# Altium PCB Placa_FdC.PcbDoc (part 1 of 2)
Units mm, origin at the board's own origin, x right, y up, seen from the top; angles counter-clockwise.
Board outline 100 x 70 mm, 2 copper layers (Top Layer, Bottom Layer), stack 1.571 mm thick; 72 components, 68 nets, 328 pads, 54 vias.
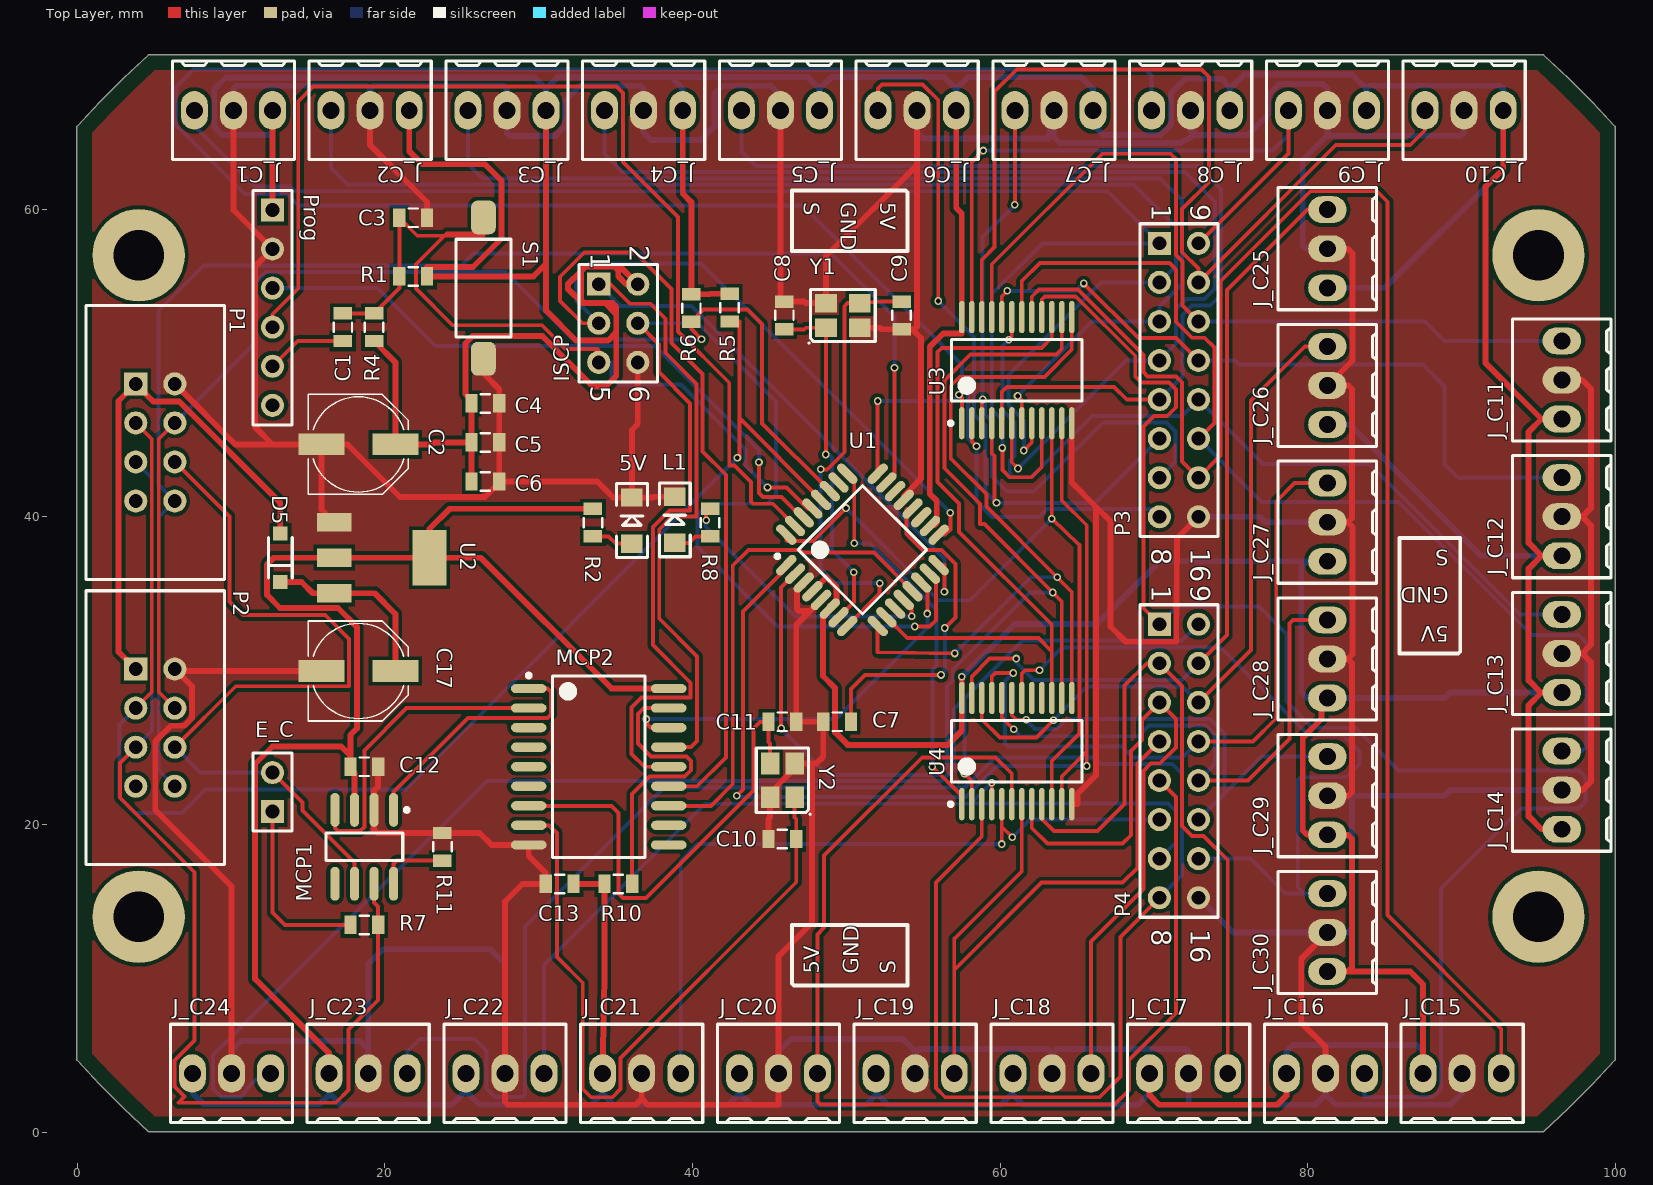
[diagram p0: Top Layer view]
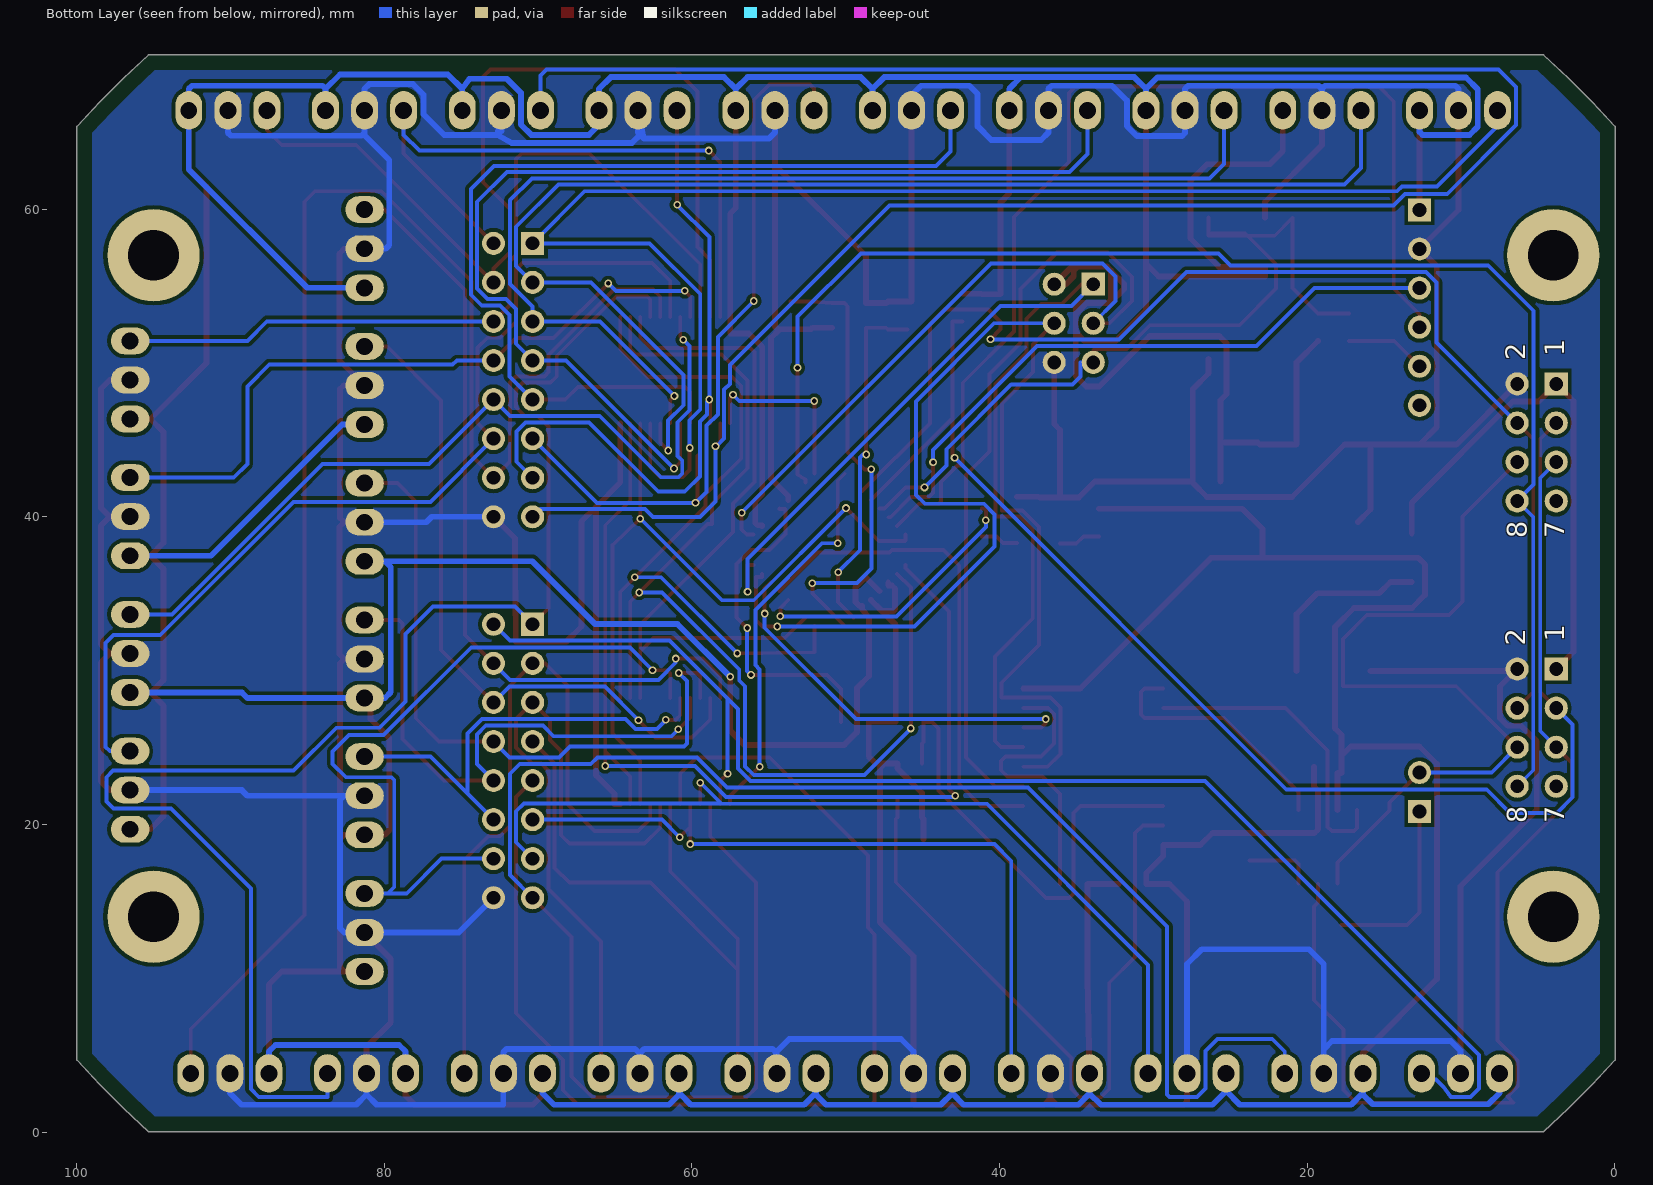
[diagram p1: Bottom Layer view, seen from below]
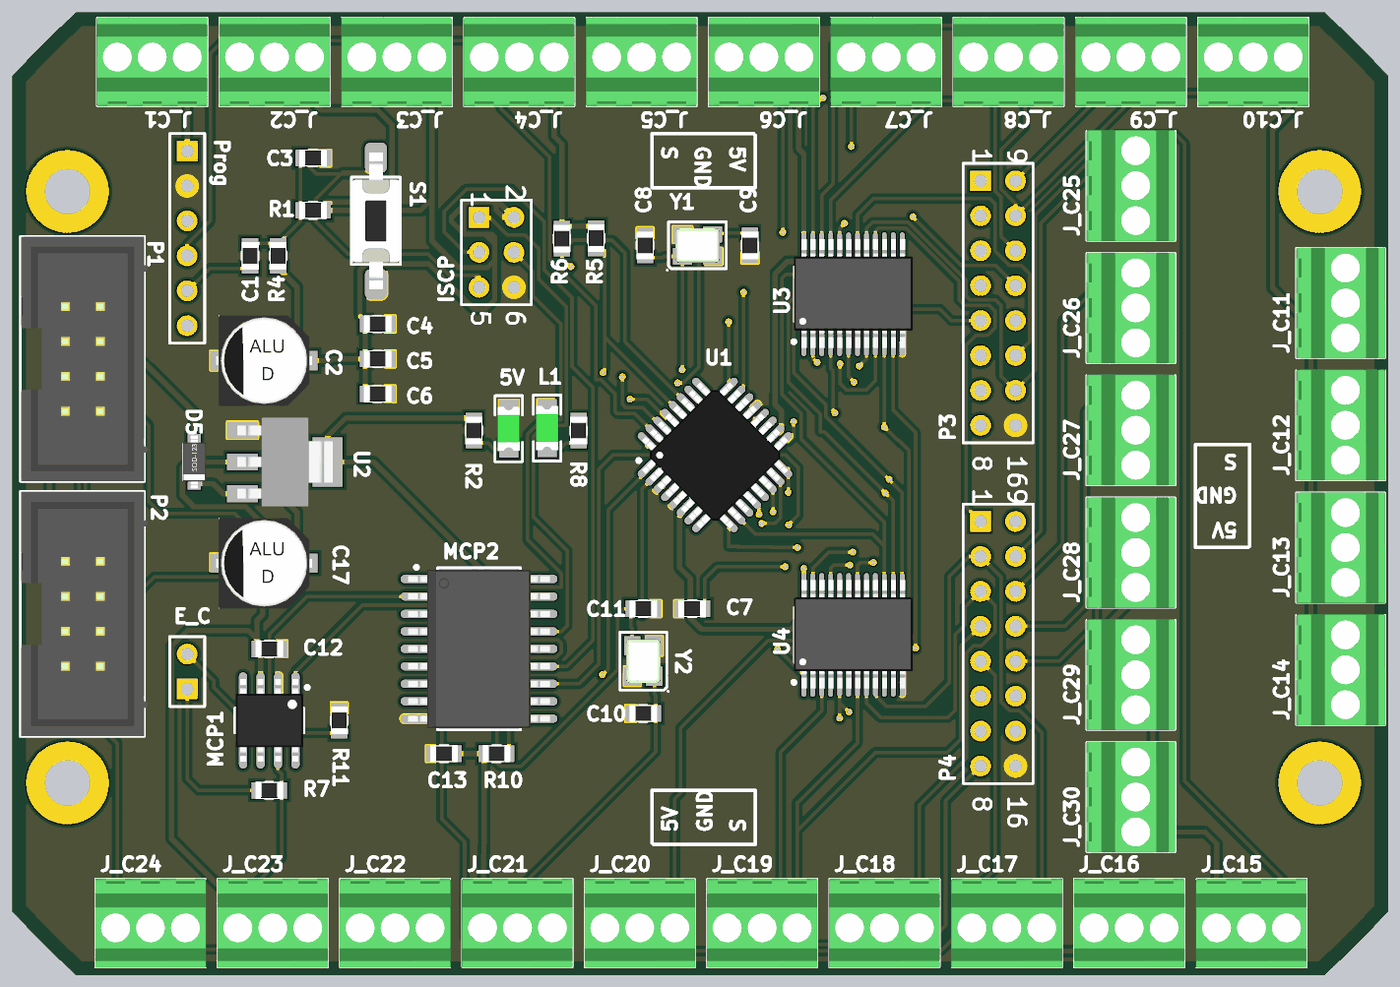
[diagram p2: 3D render of the assembled board from above, using the file's embedded part models]

## Layer stack, top to bottom
Top Solder: solder mask 0.0102, Solder Resist, Dk 3.5
Top Layer: signal copper 0.0356
Dielectric 1: dielectric 1.5, FR-4, Dk 4.8
Bottom Layer: signal copper 0.0356
Bottom Solder: solder mask 0.0102, Solder Resist, Dk 3.5

## Board outline
-0.016,49.637 -0.016,65.373 1.485,66.974 3.036,68.525 4.637,70.026 95.331,70.026 96.932,68.525 98.483,66.974 99.984,65.373 99.984,4.679 98.483,3.078 96.932,1.527 95.331,0.026 4.637,0.026 3.036,1.527 1.485,3.078 -0.016,4.679

## Design rules (kind name [scope] priority, off if disabled: settings)
BoardOutlineClearance [All] p1: gap=1 ignorepadtopadclearanceinfootprint=FALSE
Clearance Clearance_2 [InNamedPolygon('GND TOP PLANE')] p1: gap=0.254 ignorepadtopadclearanceinfootprint=FALSE except(0: Arc-Hole Track-Hole SMDPad-Hole THPad-Hole Via-Hole Fill-Hole Poly-Hole Region-Hole Text-Hole)
Clearance Clearance_1 [InNamedPolygon('GND BOTTOM PLANE')] p2: gap=0.254 ignorepadtopadclearanceinfootprint=FALSE except(0: Arc-Hole Track-Hole SMDPad-Hole THPad-Hole Via-Hole Fill-Hole Poly-Hole Region-Hole Text-Hole)
Clearance Clearance_JUMPER [InNet('GND') vs InNet('PGND')] p3: gap=0.05 ignorepadtopadclearanceinfootprint=FALSE
Clearance Clearance_POWER [InNet('24V') vs InNet('PGND')] p4: gap=0.381 ignorepadtopadclearanceinfootprint=FALSE
Clearance [All] p5: gap=0.152 ignorepadtopadclearanceinfootprint=FALSE
HoleSize [All] p1: absolutevalues=TRUE maxlimit=6.3 minlimit=0.3 maxpercent=80.000 minpercent=20.000
PlaneClearance [All] p1: clearance=5.016
PlaneConnect [All] p1: planeconnectstyle=Relief reliefexpansion=0.508 reliefentries=4 reliefconductorwidth=0.381 reliefairgap=-0.05
PolygonConnect [All] p1: connectstyle=Relief reliefconductorwidth=0.254 reliefentries=4 polygonreliefangle="90 Angle" airgapwidth=-0.05
RoomDefinition Placa_FdC_v2 [InComponentClass('Placa_FdC_v2')] p1: confinementstyle=ConfineOut formatcopy=TRUE lockcomponents=FALSE outline 196.215,89.916 196.596,89.535 196.596,84.074 200.025,84.074 200.66,84.709 200.66,88.9 199.644,89.916 199.771,90.043 199.771,93.472
RoutingVias RoutingVias_24V [InNet('24V')] p1: holewidth=0.5 width=0.8 viastyle="Through Hole" minholewidth=0.3 minwidth=0.6 maxholewidth=1 maxwidth=1.2
RoutingVias RoutingVias_PGND [InNet('PGND')] p2: holewidth=0.5 width=0.8 viastyle="Through Hole" minholewidth=0.3 minwidth=0.6 maxholewidth=1 maxwidth=1.2
RoutingVias RoutingVias_PGNDC [InNet('PGNDC')] p3: holewidth=0.5 width=0.8 viastyle="Through Hole" minholewidth=0.3 minwidth=0.6 maxholewidth=1 maxwidth=1.2
RoutingVias RoutingVias_MOTOR1 [InNet('MOTOR1')] p4: holewidth=0.5 width=0.8 viastyle="Through Hole" minholewidth=0.3 minwidth=0.6 maxholewidth=1 maxwidth=1.2
RoutingVias RoutingVias_MOTOR2 [InNet('MOTOR2')] p5: holewidth=0.5 width=0.8 viastyle="Through Hole" minholewidth=0.3 minwidth=0.6 maxholewidth=1 maxwidth=1.2
RoutingVias RoutingVias_C17_1 [InNet('NetC17_+')] p6: holewidth=0.5 width=0.8 viastyle="Through Hole" minholewidth=0.3 minwidth=0.6 maxholewidth=1 maxwidth=1.2
RoutingVias [All] p7: holewidth=0.3 width=0.5 viastyle="Through Hole" minholewidth=0.3 minwidth=0.6 maxholewidth=1 maxwidth=1.2
SMDNeckDown [All] p1: percent=120.000
SilkToSilkClearance [All] p1 off: silktosilkclearance=0.127
SolderMaskExpansion [All] p1: expansion=0.102
Width Width_Motor1 [InNet('MOTOR1')] p1: maxlimit=0.889 minlimit=0.7 preferedwidth=0.8
Width Width_Motor2 [InNet('MOTOR2')] p2: maxlimit=0.889 minlimit=0.7 preferedwidth=0.8
Width Width_24V [InNet('24V')] p3: maxlimit=0.889 minlimit=0.7 preferedwidth=0.8
Width Width_PGND [InNet('PGND')] p4: maxlimit=0.889 minlimit=0.6 preferedwidth=0.8
Width Width_PGNDC [InNet('PGNDC')] p5: maxlimit=0.889 minlimit=0.6 preferedwidth=0.8
Width Width_GND [InNet('GND')] p6: maxlimit=0.508 minlimit=0.254 preferedwidth=0.381 checkconnectedcopper=TRUE
Width Width_Vin [InNet('Vin')] p7: maxlimit=0.508 minlimit=0.254 preferedwidth=0.381 checkconnectedcopper=TRUE
Width Width_C17_1 [InNet('NetC17_+')] p8: maxlimit=0.508 minlimit=0.254 preferedwidth=0.381 checkconnectedcopper=TRUE
Width Width_5V [InNet('5V')] p9: maxlimit=0.381 minlimit=0.254 preferedwidth=0.381 checkconnectedcopper=TRUE
Width [All] p10: maxlimit=0.508 minlimit=0.254 preferedwidth=0.254
26 further rules are at their usual default settings.

## Classes and differential pairs
component class Placa_FdC_v2: 5V C1 C2 C3 C4 C5 C6 C7 C8 C9 C10 C11 C12 C13 C17 D5 E_C ISCP L1 MCP1 MCP2 P1 P2 P3 P4 Prog R1 R2 R4 R5 R6 R7 R8 R10 R11 S1 U1 U2 U3 U4 Y1 Y2
component class C1: J1_C1 J_C1
component class C2: J1_C2 J_C2
component class C3: J1_C3 J_C3
component class C4: J1_C4 J_C4
component class C5: J1_C5 J_C5
component class C6: J1_C6 J_C6
component class C7: J1_C7 J_C7
component class C8: J1_C8 J_C8
component class C9: J1_C9 J_C9
component class C10: J1_C10 J_C10
component class C11: J1_C11 J_C11
component class C12: J1_C12 J_C12
component class C13: J1_C13 J_C13
component class C14: J1_C14 J_C14
component class C15: J1_C15 J_C15
component class C16: J1_C16 J_C16
component class C17: J1_C17 J_C17
component class C18: J1_C18 J_C18
component class C19: J1_C19 J_C19
component class C20: J1_C20 J_C20
component class C21: J1_C21 J_C21
component class C22: J1_C22 J_C22
component class C23: J1_C23 J_C23
component class C24: J1_C24 J_C24
component class C25: J1_C25 J_C25
component class C26: J1_C26 J_C26
component class C27: J1_C27 J_C27
component class C28: J1_C28 J_C28
component class C29: J1_C29 J_C29
component class C30: J1_C30 J_C30
net class Fdc_[1..14]: Fdc_1 Fdc_2 Fdc_3 Fdc_4 Fdc_5 Fdc_6 Fdc_7 Fdc_8 Fdc_9 Fdc_10 Fdc_11 Fdc_12 Fdc_13 Fdc_14 Fdc_15 Fdc_16 Fdc_17 Fdc_18 Fdc_19 Fdc_20 Fdc_21 Fdc_22 Fdc_23 Fdc_24 Fdc_25 Fdc_26 Fdc_27 Fdc_28 Fdc_29 Fdc_30
channel class Conector_Fdc: C1 C2 C3 C4 C5 C6 C7 C8 C9 C10 C11 C12 C13 C14 C15 C16 C17 C18 C19 C20 C21 C22 C23 C24 C25 C26 C27 C28 C29 C30

## Components (designator, comment, footprint, x,y, rotation, side; value= is the part's Value field where it differs from the comment)
5V "1206 LED" LED-1206 36.068,39.751 r90 top
C1 "100n" 0805 17.272,52.324 r270 top
C2 "47u" PANASONIC_D 18.288,44.704 r0 top
C3 "22p" 0805 21.844,59.436 r0 top
C4 "100n" 0805 26.543,47.371 r0 top
C5 "100n" 0805 26.543,44.831 r0 top
C6 "100n" 0805 26.543,42.291 r0 top
C7 "100n" 0805 49.403,26.67 r180 top
C8 "22p" 0805 45.974,53.086 r90 top
C9 "22p" 0805 53.594,53.086 r270 top
C10 "22p" 0805 45.847,19.05 r180 top
C11 "22p" 0805 45.847,26.67 r0 top
C12 "100n" 0805 18.669,23.749 r0 top
C13 "100n" 0805 31.369,16.129 r180 top
C17 "47u" PANASONIC_D 18.288,29.972 r0 top
D5 "SOD123-1A" SOD-123 13.208,37.338 r90 top
E_C "Header 2" HDR1X2 12.7,20.828 r90 top
ISCP "Header 3X2" HDR2X3 33.909,55.118 r270 top
J_C1 "282834-3" "TE 282834-3" 10.16,66.421 r0 top (schematic designator J)
J_C2 "282834-3" "TE 282834-3" 19.05,66.421 r0 top (schematic designator J)
J_C3 "282834-3" "TE 282834-3" 27.94,66.421 r0 top (schematic designator J)
J_C4 "282834-3" "TE 282834-3" 36.83,66.421 r0 top (schematic designator J)
J_C5 "282834-3" "TE 282834-3" 45.72,66.421 r0 top (schematic designator J)
J_C6 "282834-3" "TE 282834-3" 54.61,66.421 r0 top (schematic designator J)
J_C7 "282834-3" "TE 282834-3" 63.5,66.421 r0 top (schematic designator J)
J_C8 "282834-3" "TE 282834-3" 72.39,66.421 r0 top (schematic designator J)
J_C9 "282834-3" "TE 282834-3" 81.28,66.421 r0 top (schematic designator J)
J_C10 "282834-3" "TE 282834-3" 90.17,66.421 r0 top (schematic designator J)
J_C11 "282834-3" "TE 282834-3" 96.52,48.895 r270 top (schematic designator J)
J_C12 "282834-3" "TE 282834-3" 96.52,40.005 r270 top (schematic designator J)
J_C13 "282834-3" "TE 282834-3" 96.52,31.115 r270 top (schematic designator J)
J_C14 "282834-3" "TE 282834-3" 96.52,22.225 r270 top (schematic designator J)
J_C15 "282834-3" "TE 282834-3" 90.043,3.81 r180 top (schematic designator J)
J_C16 "282834-3" "TE 282834-3" 81.153,3.81 r180 top (schematic designator J)
J_C17 "282834-3" "TE 282834-3" 72.263,3.81 r180 top (schematic designator J)
J_C18 "282834-3" "TE 282834-3" 63.373,3.81 r180 top (schematic designator J)
J_C19 "282834-3" "TE 282834-3" 54.483,3.81 r180 top (schematic designator J)
J_C20 "282834-3" "TE 282834-3" 45.593,3.81 r180 top (schematic designator J)
J_C21 "282834-3" "TE 282834-3" 36.703,3.81 r180 top (schematic designator J)
J_C22 "282834-3" "TE 282834-3" 27.813,3.81 r180 top (schematic designator J)
J_C23 "282834-3" "TE 282834-3" 18.923,3.81 r180 top (schematic designator J)
J_C24 "282834-3" "TE 282834-3" 10.033,3.81 r180 top (schematic designator J)
J_C25 "282834-3" "TE 282834-3" 81.28,57.425 r270 top (schematic designator J)
J_C26 "282834-3" "TE 282834-3" 81.28,48.535 r270 top (schematic designator J)
J_C27 "282834-3" "TE 282834-3" 81.28,39.645 r270 top (schematic designator J)
J_C28 "282834-3" "TE 282834-3" 81.28,30.755 r270 top (schematic designator J)
J_C29 "282834-3" "TE 282834-3" 81.28,21.865 r270 top (schematic designator J)
J_C30 "282834-3" "TE 282834-3" 81.28,12.975 r270 top (schematic designator J)
L1 "1206 LED" LED-1206 38.862,39.802 r90 top
MCP1 "MCP2551T-I/SN" SOIC-SN8_N 18.669,18.542 r270 top
MCP2 "MCP2515T-E/SO" SOIC-SO18_N 33.909,23.749 r0 top
P1 "IDC2X4" IDC2X4 5.08,44.831 r270 top
P2 "IDC2X4" IDC2X4 5.08,26.289 r270 top
P3 "Header 8X2A" HDR2X8_CEN 70.358,57.777 r270 top
P4 "Header 8X2A" HDR2X8_CEN 70.358,33.012 r270 top
Prog "Header 6" HDR1X6 12.7,59.944 r270 top
R1 "10K" 0805 21.844,55.626 r0 top
R2 "560" 0805 33.528,39.624 r90 top
R4 "10K" 0805 19.304,52.324 r90 top
R5 "0" 0805 42.418,53.594 r90 top
R6 "0" 0805 39.929,53.569 r90 top
R7 "124" 0805 18.669,13.462 r180 top
R8 "560" 0805 41.148,39.624 r90 top
R10 "10K" 0805 35.179,16.129 r180 top
R11 "4.7K" 0805 23.749,18.542 r270 top
S1 "FSMSMTR" "TE FSMSMTR" 26.416,54.864 r0 top
U1 "ATmega328P-AU" 32A_N 51.054,37.846 r45 top
U2 "NCP1117" SOT223 19.812,37.338 r270 top
U3 "4067" SSOP-24 61.087,49.53 r90 top
U4 "4067" SSOP-24 61.087,24.765 r90 top
Y1 "16MHz" "NDK NX3225SA" 49.784,53.086 r0 top
Y2 "16MHz" "NDK NX3225SA" 45.847,22.86 r90 top

## Footprints (in the part's own frame and the unit in brackets; to place one, negate y for a bottom-side part, rotate by r counter-clockwise, add the part's x,y. Pads: shape width x height; smd on the part's side, far side on the other; paste and mask are expansions set on the pad)
32A_N [mm] "Thin QFP, 32-Leads, Body 7x7mm, Pitch 0.8mm, IPC Medium Density"
  oval 1.65x0.55 smd: 1(-4.2,2.8) 2(-4.2,2) 3(-4.2,1.2) 4(-4.2,0.4) 5(-4.2,-0.4) 6(-4.2,-1.2) 7(-4.2,-2) 8(-4.2,-2.8) 17(4.2,-2.8) 18(4.2,-2) 19(4.2,-1.2) 20(4.2,-0.4) 21(4.2,0.4) 22(4.2,1.2) 23(4.2,2) 24(4.2,2.8)
  oval 0.55x1.65 smd: 9(-2.8,-4.2) 10(-2,-4.2) 11(-1.2,-4.2) 12(-0.4,-4.2) 13(0.4,-4.2) 14(1.2,-4.2) 15(2,-4.2) 16(2.8,-4.2) 25(2.8,4.2) 26(2,4.2) 27(1.2,4.2) 28(0.4,4.2) 29(-0.4,4.2) 30(-1.2,4.2) 31(-2,4.2) 32(-2.8,4.2)
  silkscreen extent -4.32,-2.95 2.95,3.75, body extent -4.52,-4.53 4.5,4.5, height 1.15
0805 [mil]
  rect 31.5x47.24 smd: 1(-35.43,0) 2(35.43,0)
  silkscreen extent -12,-24 12,24, body extent -39,-25 39,25, height 20
HDR1X2 [mm] "Connector; Header; 2 Position"
  rect 1.5x1.5 hole 0.9: 1(0,0)
  round 1.5 hole 0.9: 2(2.54,0)
  silkscreen extent -1.27,-1.27 3.81,1.27
HDR1X6 [mm] "Connector; Header; 6 Position"
  rect 1.5x1.5 hole 0.9: 1(0,0)
  round 1.5 hole 0.9: 2(2.54,0) 3(5.08,0) 4(7.62,0) 5(10.16,0) 6(12.7,0)
  silkscreen extent -1.27,-1.27 13.97,1.27
HDR2X3 [mm] "Connector; Header; 3x2 Position"
  rect 1.5x1.5 hole 0.9: 1(0,0)
  round 1.5 hole 0.9: 2(0,2.54) 3(2.54,0) 4(2.54,2.54) 5(5.08,0) 6(5.08,2.54)
  silkscreen extent -1.27,-1.27 6.35,3.81
HDR2X8_CEN [mm] "Connector; Header; 8x2 Position"
  rect 1.5x1.5 hole 0.9: 1(0,0)
  round 1.5 hole 0.9: 2(2.54,0) 3(5.08,0) 4(7.62,0) 5(10.16,0) 6(12.7,0) 7(15.24,0) 8(17.78,0) 9(0,2.54) 10(2.54,2.54) 11(5.08,2.54) 12(7.62,2.54) 13(10.16,2.54) 14(12.7,2.54) 15(15.24,2.54) 16(17.78,2.54)
  silkscreen extent -1.27,-1.27 19.05,3.81
IDC2X4 [mm] "IDC Connector 2x4"
  rect 1.5x1.5 hole 0.9: 1(-3.81,-1.27)
  round 1.5 hole 0.9: 2(-3.81,1.27) 3(-1.27,-1.27) 4(-1.27,1.27) 5(1.27,-1.27) 6(1.27,1.27) 7(3.81,-1.27) 8(3.81,1.27)
  silkscreen extent -8.9,-4.5 8.9,4.5, body extent -8.89,-4.45 8.89,4.76, height 9.01
LED-1206 [mm]
  rect 1.2x1.4 smd: A(-1.5,0) C(1.5,0)
  silkscreen extent -2.4,-1 2.4,1, body extent -1.6,-0.8 1.6,0.8, height 1.11
"NDK NX3225SA" [mm] "Crystal, 4-Leads, Body 2.50x3.20mm, Pitch 2.20mm, IPC Medium Density"
  rect 1.4x1.2 smd: 1(-1.1,-0.8) 2(1.1,-0.8) 3(1.1,0.8) 4(-1.1,0.8)
  silkscreen extent -2.25,-1.85 2.1,1.7, body extent -1.61,-1.26 1.61,1.26, height 0.6
PANASONIC_D [mm]
  rect 3x1.4 smd: +(2.4,0) -(-2.4,0)
  silkscreen extent -3.25,-3.25 3.25,3.25, body extent -3.5,-3.3 3.5,3.3, height 5.4
SOD-123 [mm]
  rect 0.9x0.95 smd: A(1.575,0) C(-1.575,0)
  silkscreen extent -1.3,-0.77 1.3,0.77, body extent -1.93,-0.86 1.92,0.84, height 1.46
SOIC-SN8_N [mm] "SOIC, 8-Leads, Body 4.9x3.8mm, Pitch 1.27mm, IPC Medium Density"
  oval 2.2x0.6 smd: 1(-2.4,1.905) 2(-2.4,0.635) 3(-2.4,-0.635) 4(-2.4,-1.905) 5(2.4,-1.905) 6(2.4,-0.635) 7(2.4,0.635) 8(2.4,1.905)
  silkscreen extent -2.52,-2.5 0.9,2.88, body extent -3,-2.45 3,2.45, height 1.75
SOIC-SO18_N [mm] "SOIC, 18-Leads, Body 11.5x7.5mm, Pitch 1.27mm, IPC Medium Density"
  oval 2.3x0.6 smd: 1(-4.55,5.08) 2(-4.55,3.81) 3(-4.55,2.54) 4(-4.55,1.27) 5(-4.55,0) 6(-4.55,-1.27) 7(-4.55,-2.54) 8(-4.55,-3.81) 9(-4.55,-5.08) 10(4.55,-5.08) 11(4.55,-3.81) 12(4.55,-2.54) 13(4.55,-1.27) 14(4.55,0) 15(4.55,1.27) 16(4.55,2.54) 17(4.55,3.81) 18(4.55,5.08)
  silkscreen extent -4.67,-5.9 3,6.05, body extent -5.15,-5.77 5.15,5.76, height 2.65
SOT223 [mil]
  rect 48x88 smd: 1(-91,-122) 2(0,-122) 3(91,-122)
  rect 141.73x86.61 smd: 4(0,122.01)
  body extent -128,-136 128,136, height 63
SSOP-24 [mm] "SOP, 24-Leads, Body 8,5x5,6mm (max), Pitch 0,65mm, IPC Medium Density"
  oval 2.1x0.35 smd: 1(-3.45,3.575) 2(-3.45,2.925) 3(-3.45,2.275) 4(-3.45,1.625) 5(-3.45,0.975) 6(-3.45,0.325) 7(-3.45,-0.325) 8(-3.45,-0.975) 9(-3.45,-1.625) 10(-3.45,-2.275) 11(-3.45,-2.925) 12(-3.45,-3.575) 13(3.45,-3.575) 14(3.45,-2.925) 15(3.45,-2.275) 16(3.45,-1.625) 17(3.45,-0.975) 18(3.45,-0.325) 19(3.45,0.325) 20(3.45,0.975) 21(3.45,1.625) 22(3.45,2.275) 23(3.45,2.925) 24(3.45,3.575)
  silkscreen extent -3.57,-4.25 2,4.42, body extent -3.9,-4.33 4,4.3, height 1.98
"TE 282834-3" [mm]
  oval 1.75x2.5 hole 1.1: 1(-2.54,0) 2(0,0) 3(2.54,0)
  silkscreen extent -3.97,-3.2 3.97,3.2, body extent -4.04,-3.25 4.04,3.25, height 10
"TE FSMSMTR" [mm]
  rrect50% 1.6x2.19 smd: 1(0,4.595) 2(0,-4.595)
  silkscreen extent -1.78,-3.17 1.78,3.17, body extent -1.75,-4.98 1.75,4.98, height 4.42

## Part data
5V L1: library part LED1206
C1 C3 C4 C5 C6 C7 C8 C9 C10 C11 C12 C13: library part CAP0805
C2 C17: library part 47UF-50V-20%(ELECT), PROD_ID=CAP-10547
D5: library part DIODESOD123
E_C: "Header, 2-Pin", LatestRevisionDate=17-Jul-2002, LatestRevisionNote="Re-released for DXP Platform.", Publisher="Altium Limited"
ISCP: "Header, 3-Pin, Dual row", LatestRevisionDate=17-Jul-2002, LatestRevisionNote="Re-released for DXP Platform.", Publisher="Altium Limited"
J_C1 J_C2 J_C3 J_C4 J_C5 J_C6 J_C7 J_C8 J_C9 J_C10 J_C11 J_C12 J_C13 J_C14 J_C15 J_C16 J_C17 J_C18 J_C19 J_C20 J_C21 J_C22 J_C23 J_C24 J_C25 J_C26 J_C27 J_C28 J_C29 J_C30: "TERM BLOCK 3POS SIDE ENT 2.54MM", Colour=Green, Manufacturer="TE Connectivity AMP Connectors", Supplier Part Number 1=A98334-ND, TemperatureRange="-40C ~ 105C", Voltage=150V, ComponentLink1Description=Datasheet, ComponentLink1URL=http://www.te.com/commerce/DocumentDelivery/DDEController?Action=srchrtrv&DocNm=282834&DocType=Customer+Drawing&DocLang=English, ComponentLink2Description="Digi-Key Listing", ComponentLink2URL=http://www.digikey.ca/product-detail/en/282834-3/A98334-ND/1153264, Number Of Levels=1, Orientation="Horizontal with Board", PartId=9290, Part Number=282834-3, Pitch="0.100\" (2.54mm)", Positions Per Level=3, Price=2,25, Supplier 1=Digi-Key
MCP1: "High-Speed CAN Transceiver, 8-Pin SOIC, Industrial Temperature, Tape and Reel", Supplier Part Number 1=MCP2551T-I/SNTR-ND, Code_IPC=SOIC127P600-8, Code_JEDEC=MS-012, ComponentLink1Description=Datasheet, ComponentLink1URL=http://ww1.microchip.com/downloads/en/DeviceDoc/21667E.pdf, ComponentLink2Description="Packaging Specification", ComponentLink2URL=http://www.microchip.com/stellent/groups/techpub_sg/documents/packagingspec/en012702.pdf, ComponentLink3Description="Microchip.com Home", ComponentLink3URL=http://www.microchip.com/, DatasheetVersion="revE, Jan-2007", PackageDescription="8-Lead Plastic Small Outline (SN) - Narrow, 3.90mm Body [SOIC]", PackageReference=SOIC-SN8, PackageVersion="revBB, Aug-2009", Published=29-Jan-2009, Publisher="Altium Limited", Supplier 1=Digi-Key, Supplier 2=Farnell, Supplier Part Number 2=1788569
MCP2: "Stand-Alone CAN Controller With SPI Interface, 18-Pin SOIC, Extended Temperature, Tape and Reel", Supplier Part Number 1=MCP2515T-E/SO-ND, Code_JEDEC=MS-013, ComponentLink1Description=Datasheet, ComponentLink1URL=http://ww1.microchip.com/downloads/en/DeviceDoc/21801e.pdf, ComponentLink2Description="Packaging Specification", ComponentLink2URL=http://www.microchip.com/stellent/groups/techpub_sg/documents/packagingspec/en012702.pdf, ComponentLink3Description="Microchip.com Home", ComponentLink3URL=http://www.microchip.com/, DatasheetVersion="revE, Nov-2007", PackageDescription="18-Lead Plastic Small Outline (SO) - Wide 7.50mm Body [SOIC]", PackageReference=SOIC-SO18, PackageVersion="revBB, Aug-2009", Published=29-Jan-2009, Publisher="Altium Limited", Supplier 1=Digi-Key
P1 P2: "Header, 4-Pin, Dual row", LatestRevisionDate=17-Jul-2002, LatestRevisionNote="Re-released for DXP Platform.", Publisher="Altium Limited"
P3 P4: "Header, 8-Pin, Dual row", LatestRevisionDate=17-Jul-2002, LatestRevisionNote="Re-released for DXP Platform.", Publisher="Altium Limited"
Prog: "Header, 6-Pin", LatestRevisionDate=17-Jul-2002, LatestRevisionNote="Re-released for DXP Platform.", Publisher="Altium Limited"
R1 R2 R4 R5 R6 R7 R8 R10 R11: library part RESISTOR0805-RES
S1: "SWITCH TACTILE SPST-NO 0.05A 24V", Contact Rating @ Voltage="0.05A @ 24VDC", Illumination Type, Colour=-, Manufacturer="TE Connectivity Alcoswitch Switches", Operating Force=180gf, Operating Temperature="-35C ~ 85C", Supplier Part Number 1=450-1758-2-ND, Actuator Orientation="Top Actuated", Actuator Type=Standard, Circuit=SPST-NO, ComponentLink1Description=Datasheet, ComponentLink1URL=http://www.te.com/commerce/DocumentDelivery/DDEController?Action=srchrtrv&DocNm=1437566-3&DocType=Customer+Drawing&DocLang=English, ComponentLink2Description="Digi-Key Listing", ComponentLink2URL=http://www.digikey.com/product-detail/en/FSMSMTR/450-1758-2-ND/529671, Illumination=Non-Illuminated, Illumination Voltage=-, Mechanical Life="20,000 Cycles", PartId=8251, Part Number=FSMSMTR, Price=0,175, Supplier 1=Digi-Key, Switch Function=Off-Mom, Switch Travel=0.25mm
U1: "8-bit AVR Microcontroller, 32KB Flash, 1KB EEPROM, 2KB SRAM, 32-pin TQFP, Industrial Grade (-40°C to 85°C)", Supplier Part Number 1=ATMEGA328P-AU-ND, Code_JEDEC=MS-026-ABA, ComponentLink1Description="Manufacturer Link", ComponentLink1URL=http://www.atmel.com/products/avr/default.asp?, ComponentLink2Description="ATmega48A/48PA/88A/88PA/168A/168PA/328/328P Datasheet", ComponentLink2URL=http://www.atmel.com/dyn/resources/prod_documents/8271.pdf, ComponentLink3Description="ATmega48A/48PA/88A/88PA/168A/168PA/328/328P Summary", ComponentLink3URL=http://www.atmel.com/dyn/resources/prod_documents/8271S.pdf, ComponentLink4Description="Atmel.com Home", ComponentLink4URL=http://www.atmel.com, DatasheetVersion="revA, Jan-2010", PackageDescription="32-Lead, 7x7x1.0 mm Body, 0.8mm Lead Pitch, Thin Profile Plastic Quad Flat Package (TQFP)", PackageReference=32A, PackageVersion="revB, Oct-2001", Published=1-Apr-2010, Publisher="Altium Limited", Supplier 1=Digi-Key, Supplier 2=Farnell, Supplier 3=Mouser, Supplier Part Number 2=1715486, Supplier Part Number 3=556-ATMEGA328P-AU
U2: library part V_REG_LM1117SOT223, PROD_ID=VREG-08170
U3 U4: library part MUX-74HC4067, "MUX-74HC4067"
Y1 Y2: library part NX3225SA-16.000MHZ-STD-CSR-1, "CRYSTAL 16.0000MHZ 8PF SMD", Device Package="4-SMD, No Lead (DFN, LCC)", Frequency Stability=15ppm, Load Capacitance=8pF, Manufacturer=NDK, Operating Mode=Fundamental, Supplier Part Number 1=644-1049-2-ND, ComponentLink1Description=Datasheet, ComponentLink1URL=http://media.digikey.com/pdf/Data%20Sheets/NDK%20PDFs/NX3225SA.pdf, ComponentLink2Description="Digi-Key Listing", ComponentLink2URL=http://www.digikey.com/product-detail/en/NX3225SA-16.000MHZ-STD-CSR-1/644-1049-2-ND/1128831, ESR="80 Ohm", Frequency=16MHz, Frequency Tolerance=15ppm, PartId=8509, Part Number=NX3225SA-16.000MHZ-STD-CSR-1, Price=0,3799, Supplier 1=Digi-Key, Type="MHz Crystal"

## Free pads (board coordinates)
  round 6 hole 3.3: 7(4,14) 8(95,14) 9(4,57) 10(95,57)

## Via types
v1: diameter 0.5, hole 0.3, Top Layer to Bottom Layer, 54 vias

## Nets (pads, with @x,y where several pads share a name; then routed paths per layer and width w, separated by ;. In a path a pad name is that pad's centre, name@x,y a point inside that pad or via, vN(x,y) a via of type N, cw(c..) or ccw(c..) an arc to the next point about the centre after c; other vN are vias at no path point)
5V: C2.+ C4.1 C5.1 C6.1 C12.1 C13.1 ISCP.2 J_C1.3 J_C2.3 J_C3.3 J_C4.3 J_C5.3 J_C6.3 J_C7.3 J_C8.3 J_C9.3 J_C10.3 J_C11.3 J_C12.3 J_C13.3 J_C14.3 J_C15.3 J_C16.3 J_C17.3 J_C18.3 J_C19.3 J_C20.3 J_C21.3 J_C22.3 J_C23.3 J_C24.3 J_C25.3 J_C26.3 J_C27.3 J_C28.3 J_C29.3 J_C30.3 MCP1.3 MCP2.18 Prog.1 R1.2 R2.2 R4.1 R5.2 R6.2 R10.2 U1.4 U1.6 U1.18 U2.2 U2.4 U3.24 U4.24 | length 674.6
  Top Layer w0.381: Prog.1 J_C1.3 ; J_C23.3 16.383,5.131 11.557,9.957 11.557,23.927 12.7,25.07 17.17,25.07 17.769,24.471 ; MCP1.3 18.034,23.34 17.769,23.34 C12.1 17.769,24.471 ; R4.1 20.688,50.04 C2.+ 23.089,44.704 23.216,44.831 C5.1 ; J_C2.3 21.59,63.754 22.428,62.916 26.518,62.916 27.584,61.849 27.584,58.09 25.73,56.236 22.744,56.236 R1.2 29.667,55.626 30.48,56.439 ; C6.1 C5.1 ; J_C3.3 30.48,56.439 ; C13.1 R10.2 34.279,10.073 J_C21.3 ; R2.2 24.217,40.524 22.911,39.218 U2.4 ; MCP2.18 34.747,28.829 26.238,37.338 U2.4 ; J_C4.3 39.37,61.011 39.929,60.452 R6.2 41.148,54.469 41.173,54.494 R5.2 ; U1.4 48.716,36.074 49.378,35.412 49.378,34.468 49.124,34.214 48.933,34.214 U1.6 48.489,33.401 48.489,29.642 49.276,28.854 49.276,25.984 50.089,25.171 56.591,25.171 57.512,26.092 U4.24 v1(57.512,29.597) ; U1.18 55.438,39.446 55.728,39.446 55.88,39.599 55.88,41.035 55.433,41.482 55.433,51.044 56.307,51.918 57.512,51.918 U3.24 57.512,59.715 57.15,60.077 J_C6.3 ; J_C17.3 69.723,2.388 70.333,1.778 78.029,1.778 78.613,2.362 J_C16.3 ; J_C30.3 82.601,10.435 ; J_C28.3 80.899,28.215 80.899,26.848 79.68,25.629 79.68,19.604 79.959,19.325 J_C29.3 82.605,19.325 82.88,19.05 82.88,10.714 82.601,10.435 ; J_C15.3 87.503,9.597 86.665,10.435 82.601,10.435 ; J_C10.3 92.71,62.611 91.567,61.468 91.567,49.987 95.199,46.355 ; J_C14.3 95.199,19.685 94.361,20.523 94.361,27.737 95.199,28.575 ; J_C13.3 95.199,28.575 ; J_C12.3 95.199,37.465 ; J_C11.3 95.199,46.355 ; 17.769,24.471 17.769,25.821 18.186,26.238 18.186,32.842 16.954,34.074 13.195,34.074 12.344,34.925 12.344,36.906 12.776,37.338 U2.2 U2.4 ; C5.1 C4.1 25.643,47.574 25.248,47.97 25.248,51.283 25.705,51.74 30.251,51.74 33.528,48.463 34.366,48.463 35.052,49.149 35.052,51.994 ; 30.48,56.439 30.48,53.416 32.436,51.46 34.519,51.46 35.052,51.994 ; 32.766,55.982 32.766,54.077 32.944,53.898 ; 32.766,55.982 32.766,56.007 33.02,56.261 33.045,56.261 ; 32.766,55.982 31.902,55.118 31.902,54.813 32.817,53.898 32.944,53.898 ; 32.766,55.982 33.045,56.261 ; 32.944,53.898 34.316,53.898 ; 33.045,56.261 34.95,56.261 ; 34.316,53.898 35.052,53.162 ; 34.316,53.898 34.799,53.898 35.052,53.645 35.052,53.162 ; 34.95,56.261 35.179,56.032 35.179,55.626 35.687,55.118 ISCP.2 35.306,56.261 34.95,56.261 ; 35.052,51.994 35.052,53.162 ; 95.199,28.575 95.148,28.575 94.361,29.362 94.361,36.627 95.199,37.465 ; 95.199,37.465 94.361,38.303 94.361,45.517 95.199,46.355
  Bottom Layer w0.381: J_C24.3 7.493,2.54 8.23,1.803 15.748,1.803 16.383,2.438 ; J_C1.3 12.7,65.024 12.497,64.821 9.449,64.821 8.915,65.354 8.915,67.793 9.677,68.554 29.744,68.554 30.48,67.818 ; J_C23.3 16.383,2.438 ; J_C22.3 J_C22.3@25.273,2.667 ; J_C3.3 30.48,67.818 ; 33.401,1.778 33.398,1.778 ; J_C21.3 34.163,2.489 ; 38.634,68.554 39.37,67.818 J_C4.3 ; J_C20.3 43.053,2.54 ; J_C5.3 48.26,67.818 ; J_C19.3 51.943,2.438 ; J_C6.3 57.15,67.818 ; v1(57.512,29.597) 60.935,33.02 66.294,33.02 70.379,37.105 79.955,37.105 ; J_C18.3 60.833,2.438 ; J_C17.3 69.723,2.54 68.961,1.778 61.493,1.778 60.833,2.438 ; J_C8.3 74.93,67.818 ; J_C16.3 78.613,5.232 79.045,5.664 87.071,5.664 87.503,5.232 J_C15.3 ; J_C27.3 79.955,37.105 ; J_C26.3 82.732,45.995 91.262,37.465 J_C12.3 ; J_C25.3 85.014,54.885 92.71,62.581 J_C10.3 92.71,67.818 92.507,68.021 84.023,68.021 83.82,67.818 ; J_C9.3 83.82,67.818 ; J_C13.3 89.26,28.575 88.9,28.215 J_C28.3 79.959,28.215 79.578,28.596 79.578,36.728 79.955,37.105 ; 16.383,2.438 16.485,2.438 17.145,1.778 24.384,1.778 J_C22.3@25.273,2.667 ; J_C22.3@25.273,2.667 26.162,1.778 33.398,1.778 ; 30.48,67.818 31.242,68.58 47.498,68.58 48.26,67.818 ; 33.398,1.778 33.4,1.779 34.163,2.489 ; 34.163,2.489 34.874,1.778 42.342,1.778 43.053,2.489 43.053,2.54 ; 43.053,2.54 43.815,1.778 51.283,1.778 51.943,2.438 ; 48.26,67.818 49.022,68.58 56.388,68.58 57.15,67.818 ; 51.943,2.438 52.045,2.438 52.705,1.778 60.071,1.778 60.782,2.489 60.833,2.438 ; 57.15,67.818 57.912,68.58 65.278,68.58 66.04,67.818 J_C7.3 66.04,65.481 66.693,64.828 70.442,64.828 71.12,65.507 71.12,67.564 72.034,68.478 74.473,68.478 74.93,67.818 ; 74.93,67.818 75.87,68.758 82.88,68.758 83.82,67.818
AREF: C7.1 U1.20 | length 22
  Top Layer w0.254: C7.1 50.303,28.804 51.217,29.718 v1(56.159,29.718) ; U1.20 54.307,40.513 53.95,40.513 53.924,40.488 53.924,38.887 54.966,37.846 56.185,37.846 57.099,36.932 57.099,33.452 v1(56.413,32.766)
  Bottom Layer w0.254: v1(56.159,29.718) 56.413,29.972 v1(56.413,32.766)
C_CS: MCP2.16 U1.14 | length 25.7
  Top Layer w0.254: v1(37.008,26.848) 37.008,26.568 37.287,26.289 MCP2.16 ; U1.14 55.27,35.327 v1(55.27,33.706)
  Bottom Layer w0.254: v1(37.008,26.848) 49.332,26.848 55.27,32.787 v1(55.27,33.706)
CANH: MCP1.7 P1.5 P2.5 R7.1 | length 71.6
  Top Layer w0.254: P2.5 2.781,23.99 2.781,21.73 3.649,20.862 7.62,16.891 7.62,5.944 6.339,4.663 6.339,2.957 6.985,2.311 6.579,1.905 16.815,1.905 17.653,2.743 17.653,6.655 19.569,8.571 R7.1 19.569,14.656 19.304,14.921 MCP1.7
  Bottom Layer w0.254: P2.5 4.851,26.06 4.851,42.52 P1.5
CANL: E_C.2 MCP1.6 P1.6 P2.6 | length 51.8
  Top Layer w0.254: P2.6 10.312,28.981 17.678,28.981 17.678,32.055 16.129,33.604 10.795,33.604 9.906,34.493 9.906,40.005 P1.6 ; E_C.2 14.656,21.412 14.656,20.904 18.034,17.526 MCP1.6
  Bottom Layer w0.254: P2.6 8.001,23.368 E_C.2
CTAL1: C10.1 MCP2.8 Y2.1 | length 46
  Top Layer w0.254: MCP2.8 30.683,19.939 31.191,19.431 31.191,11.379 32.868,9.703 32.868,2.794 33.401,2.261 34.798,2.261 35.331,2.794 35.331,4.826 46.747,16.242 C10.1 46.747,20.345 46.647,20.445 Y2.1
CTAL2: C11.1 MCP2.7 Y2.3 | length 31
  Top Layer w0.254: MCP2.7 34.747,21.209 35.204,20.752 35.204,15.494 35.484,15.215 36.982,15.215 43.967,22.2 43.967,26.238 44.399,26.67 C11.1 44.947,25.348 45.047,25.248 Y2.3
EN: U1.10 U3.15 U4.15 | length 46.4
  Top Layer w0.254: U1.10 53.966,32.106 62.498,32.106 63.362,31.242 ; U4.15 63.362,31.242 ; U3.15 63.362,51.638 62.702,50.978 56.21,50.978 55.931,50.698 55.931,42.266 57.328,40.869 57.328,39.021 63.362,32.986 63.362,31.242
FdC_1: J_C1.1 P3.1 U3.9 | length 96.8
  Top Layer w0.254: v1(60.147,44.475) 60.147,43.028 60.604,42.57 62.038,42.57 62.712,43.244 U3.9
  Bottom Layer w0.254: J_C1.1 7.62,65.405 11.557,61.468 13.851,61.468 14.156,61.163 66.971,61.163 P3.1 62.755,57.777 59.461,54.483 59.461,46.959 60.147,46.274 v1(60.147,44.475)
FdC_2: J_C2.1 P3.2 U3.8 | length 83.9
  Top Layer w0.254: v1(61.544,44.307) 62.062,44.825 U3.8
  Bottom Layer w0.254: J_C2.1 16.51,62.662 17.577,61.595 68.682,61.595 71.425,58.852 71.425,56.303 P3.2 66.565,55.237 60.554,49.225 60.554,47.247 61.544,46.257 v1(61.544,44.307)
FdC_3: J_C3.1 P3.3 U3.7 | length 72.5
  Top Layer w0.254: v1(61.138,47.854) 61.412,47.579 U3.7
  Bottom Layer w0.254: J_C3.1 25.4,62.941 26.34,62.001 70.409,62.001 71.831,60.579 71.831,55.141 70.358,53.668 P3.3 65.981,52.697 v1(61.138,47.854)
FdC_4: J_C4.1 P3.4 U3.6 | length 71.5
  Top Layer w0.254: U3.6 60.762,43.541 v1(61.168,43.135)
  Bottom Layer w0.254: J_C4.1 34.29,63.576 35.458,62.408 72.034,62.408 73.965,60.477 73.965,54.839 73.279,54.153 72.087,54.153 71.45,53.516 71.45,51.249 P3.4 68.19,50.157 v1(61.168,43.135)
FdC_5: J_C5.1 P3.5 U3.5 | length 63.7
  Top Layer w0.254: U3.5 60.112,48.108 60.442,48.438 67.412,48.438 68.233,47.617 P3.5
  Bottom Layer w0.254: J_C5.1 43.18,63.754 44.12,62.814 72.873,62.814 74.371,61.316 74.371,54.432 73.665,53.726 72.472,53.726 71.869,53.123 71.869,49.128 P3.5
FdC_6: J_C6.1 P3.6 U3.4 | length 51.2
  Top Layer w0.254: J_C6.1 52.07,67.843 52.324,68.097 54.966,68.097 55.982,67.081 v1(55.982,54.026) ; U3.4 59.462,44.117 59.639,43.94 59.639,41.028 v1(59.766,40.901)
  Bottom Layer w0.254: v1(55.982,54.026) 58.318,51.689 58.318,46.66 59.055,45.923 59.055,41.613 v1(59.766,40.901) 66.183,40.901 P3.6
FdC_7: J_C7.1 P3.7 U3.3 | length 44.4
  Top Layer w0.254: U3.3 58.812,47.571 v1(58.866,47.625) ; v1(60.96,60.274) J_C7.1
  Bottom Layer w0.254: v1(60.96,60.274) 58.866,58.18 v1(58.866,47.625) 59.03,47.461 59.03,46.637 59.487,46.179 59.487,42.616 60.468,41.635 62.191,41.635 66.682,46.126 70.815,46.126 71.399,45.542 71.399,43.578 P3.7
FdC_8: J_C8.1 P3.8 U3.2 | length 150
  Top Layer w0.254: U3.2 58.162,44.886 v1(58.471,44.577)
  Bottom Layer w0.254: v1@58.42,44.577 57.912,45.085 57.912,48.26 57.531,48.641 57.531,49.86 47.168,60.223 14.402,60.223 13.64,60.985 10.897,60.985 6.426,65.456 6.426,67.945 7.569,69.088 69.444,69.088 69.85,68.682 J_C8.1 ; v1(58.471,44.577) 58.471,40.996 59.488,39.979 62.534,39.979 63.051,40.495 66.351,40.495 66.369,40.513 69.842,40.513 P3.8
FdC_9: J_C9.1 P3.9 U3.23 | length 44.1
  Top Layer w0.254: U3.23 58.162,63.064 v1(58.903,63.805) ; P3.9 78.74,63.619 J_C9.1
  Bottom Layer w0.254: v1(58.903,63.805) 77.724,63.805 78.74,64.821 J_C9.1
FdC_10: J_C10.1 P3.10 U3.22 | length 64.4
  Top Layer w0.254: U3.22 58.812,56.704 59.639,57.531 59.639,67.64 61.087,69.088 73.101,69.088 73.584,68.605 73.584,61.747 71.831,59.995 71.831,57.196 72.898,56.129 P3.10 81.822,64.16 86.665,64.16 87.63,65.126 J_C10.1
FdC_11: J_C11.1 P3.11 U3.21 | length 53.8
  Top Layer w0.254: U3.21 59.462,56.414 66.65,63.602 71.069,63.602 71.425,63.246 71.425,57.028 71.857,56.596 71.857,53.738 P3.11
  Bottom Layer w0.254: P3.11 87.638,52.697 88.9,51.435 J_C11.1
FdC_12: J_C12.1 P3.12 U3.20 | length 46.3
  Top Layer w0.254: U3.20 60.112,54.331 v1(60.468,54.686) ; v1(65.43,55.169) 68.986,51.613 71.442,51.613 P3.12
  Bottom Layer w0.254: v1(60.468,54.686) 64.948,54.686 v1(65.43,55.169) ; P3.12 75.286,50.157 75.557,49.886 87.478,49.886 88.9,48.463 88.9,43.434 89.789,42.545 J_C12.1
FdC_13: J_C13.1 P3.13 U3.19 | length 54.7
  Top Layer w0.254: v1(60.566,51.511) 60.762,51.707 U3.19
  Bottom Layer w0.254: v1(60.566,51.511) 60.147,51.092 60.147,46.925 60.93,46.142 60.93,43.946 60.63,43.646 60.63,42.822 60.882,42.57 62.003,42.57 65.991,46.558 71.84,46.558 P3.13 77.081,43.434 84.027,43.434 93.806,33.655 J_C13.1
FdC_14: J_C14.1 P3.14 U3.18 | length 65.1
  Top Layer w0.254: U3.18 61.412,55.316 62.586,56.49 71.018,56.49 71.425,56.083 71.425,52.68 72.466,51.638 73.279,51.638 73.927,50.99 73.927,46.106 P3.14
  Bottom Layer w0.254: P3.14 77.004,40.97 85.903,40.97 94.564,32.309 97.612,32.309 98.12,31.801 98.12,25.044 97.841,24.765 J_C14.1
FdC_15: J_C15.1 P3.15 U3.17 | length 107.7
  Top Layer w0.254: U3.17 62.062,54.305 62.519,54.762 65.065,54.762 69.317,50.511 69.317,49.407 69.596,49.128 71.446,49.128 71.831,48.743 71.831,43.603 P3.15 74.333,43.972 74.333,55.308 80.188,61.163 84.506,61.163 85.192,60.477 85.192,14.097 92.583,6.706 J_C15.1
FdC_16: J_C16.1 P4.1 U3.16 | length 98.7
  Top Layer w0.254: U3.16 62.712,54.127 62.915,54.331 64.922,54.331 68.788,50.465 68.788,49.124 69.194,48.717 70.993,48.717 71.425,48.285 71.425,47.117 70.866,46.558 70.002,46.558 69.317,45.872 69.317,34.053 P4.1
  Bottom Layer w0.254: P4.1 71.509,34.163 76.835,34.163 78.613,32.385 78.613,27.991 80.319,26.284 83.113,26.284 85.903,23.495 97.638,23.495 98.069,23.063 98.069,21.488 97.612,21.031 93.878,21.031 88.671,15.824 88.671,2.794 88.158,2.281 83.693,2.281 J_C16.1
FdC_17: J_C17.1 P4.2 U4.9 | length 46.9
  Top Layer w0.254: U4.9 62.712,20.345 63.499,19.558 66.325,19.558 68.097,21.331 68.097,29.032 69.537,30.472 P4.2 71.831,28.998 71.831,19.888 72.466,19.253 73.228,19.253 74.803,17.678 J_C17.1
FdC_18: J_C18.1 P4.3 U4.8 | length 45.2
  Top Layer w0.254: U4.8 62.062,19.777 63.094,18.745 67.97,18.745 68.517,19.292 68.517,24.778 69.215,25.476 69.215,26.789 P4.3 71.425,26.865 71.425,24.994 70.409,23.978 69.825,23.978 69.329,23.482 69.329,15.799 65.913,12.383 J_C18.1
FdC_19: J_C19.1 P4.4 U4.7 | length 42.8
  Top Layer w0.254: J_C19.1 57.023,10.516 ; 57.023,10.541 62.7,16.218 67.97,16.218 68.923,17.171 68.923,23.957 P4.4 ; 57.023,10.566 57.023,12.548 ; 57.023,12.573 57.023,12.548 ; U4.7 61.412,16.937 57.023,12.548
FdC_20: J_C20.1 P4.5 U4.6 | length 76
  Top Layer w0.254: U4.6 60.762,23.312 59.715,24.359 54.943,24.359 48.565,17.981 48.565,13.284 48.133,12.852 J_C20.1 48.133,1.981 48.336,1.778 67.437,1.778 68.377,2.718 68.377,4.674 71.425,7.722 71.425,21.785 P4.5
FdC_21: J_C21.1 P4.6 U4.5 | length 48.7
  Top Layer w0.254: v1(60.112,18.72) 60.112,19.849 ; U4.5 60.112,19.849 ; v1(60.796,19.165) 60.112,19.849
  Bottom Layer w0.254: J_C21.1 39.243,17.628 40.335,18.72 v1(60.112,18.72) ; v1(60.796,19.165) 61.942,20.312 P4.6
FdC_22: J_C22.1 P4.7 U4.4 | length 59.5
  Top Layer w0.254: U4.4 v1(59.461,22.708)
  Bottom Layer w0.254: J_C22.1 30.353,10.871 40.822,21.34 43.541,21.34 58.094,21.361 ; v1(59.461,22.708) 59.44,22.708 58.094,21.361 ; P4.7 71.425,18.838 71.425,20.853 70.917,21.361 58.094,21.361
FdC_23: J_C23.1 P4.8 U4.3 | length 124.9
  Top Layer w0.254: U4.3 58.812,19.213 55.829,16.231 55.829,2.87 56.439,2.261 66.472,2.261 67.818,3.607 67.818,12.692 P4.8
  Bottom Layer w0.254: J_C23.1 21.463,5.232 22.276,6.045 25.832,6.045 26.619,5.258 26.619,2.819 27.158,2.281 28.956,2.281 29.108,2.433 29.108,13.36 38.152,22.404 57.711,22.404 59.666,24.359 66.146,24.359 66.577,23.927 71.196,23.927 71.831,23.292 71.831,16.705 P4.8
FdC_24: J_C24.1 P4.9 U4.2 | length 92.1
  Top Layer w0.254: v1(57.683,23.292) 58.162,22.813 U4.2
  Bottom Layer w0.254: J_C24.1 12.573,3.429 11.633,3.429 11.176,2.972 10.668,2.281 9.378,2.281 8.839,2.819 8.839,5.004 26.645,22.81 56.181,22.81 56.998,23.627 56.998,27.497 57.683,28.182 ; v1(57.683,23.292) 57.683,28.182 ; P4.9 71.84,31.953 61.454,31.953 57.683,28.182
FdC_25: J_C25.1 P4.10 U4.23 | length 51.5
  Top Layer w0.254: U4.23 58.162,29.616 59.326,30.78 v1(61.062,30.78) ; P4.10 74.752,32.326 74.752,54.728 79.989,59.965 J_C25.1
  Bottom Layer w0.254: v1(61.062,30.78) 61.062,30.509 62.182,29.388 71.814,29.388 P4.10
FdC_26: J_C26.1 P4.11 U4.22 | length 45.2
  Top Layer w0.254: U4.22 58.812,26.826 59.984,25.654 62.357,25.654 v1(63.475,26.772) ; P4.11 76.302,31.335 76.302,47.57 79.807,51.075 J_C26.1
  Bottom Layer w0.254: v1(63.475,26.772) 65.664,28.961 71.869,28.961 P4.11
FdC_27: J_C27.1 P4.12 U4.21 | length 44.7
  Top Layer w0.254: U4.21 59.462,29.616 59.691,29.845 v1(60.858,29.845) ; P4.12 76.446,25.392 77.953,26.899 77.953,40.996 79.142,42.185 J_C27.1
  Bottom Layer w0.254: v1(60.858,29.845) 60.325,29.312 60.325,25.257 60.512,25.07 67.92,25.07 68.631,24.359 71.865,24.359 P4.12
FdC_28: J_C28.1 P4.13 U4.20 | length 36.7
  Top Layer w0.254: U4.20 60.112,26.959 v1(60.884,26.187) ; P4.13 76.107,22.852 78.816,25.561 78.816,33.071 79.04,33.295 J_C28.1
  Bottom Layer w0.254: v1(60.884,26.187) 61.341,25.73 68.986,25.73 69.677,26.421 73.401,26.421 73.965,25.857 73.965,23.918 P4.13
FdC_29: J_C29.1 P4.14 U4.19 | length 29.9
  Top Layer w0.254: U4.19 60.762,27.097 61.062,26.797 v1(61.697,26.797)
  Bottom Layer w0.254: v1(61.697,26.797) 62.281,26.213 63.678,26.213 64.313,26.848 73.66,26.848 74.6,25.908 74.6,22.013 ; P4.14 74.6,22.013 ; J_C29.1 76.991,24.405 74.6,22.013
FdC_30: J_C30.1 P4.15 U4.18 | length 49.2
  Top Layer w0.254: U4.18 61.412,29.82 61.615,30.023 v1(62.56,30.023)
  Bottom Layer w0.254: v1(62.56,30.023) 64.038,31.501 74.346,31.501 80.04,25.806 82.296,25.806 83.363,24.74 83.363,23.927 82.499,23.063 79.527,23.063 79.35,22.885 79.35,15.921 79.756,15.515 ; P4.15 76.28,17.772 78.537,15.515 79.756,15.515 ; J_C30.1 79.756,15.515
GND: 5V.C C2.- C3.2 C4.2 C5.2 C6.2 C7.2 C8.2 C9.2 C10.2 C11.2 C12.2 C13.2 C17.- ISCP.6 J_C1.2 J_C2.2 J_C3.2 J_C4.2 J_C5.2 J_C6.2 J_C7.2 J_C8.2 J_C9.2 J_C10.2 J_C11.2 J_C12.2 J_C13.2 J_C14.2 J_C15.2 J_C16.2 J_C17.2 J_C18.2 J_C19.2 J_C20.2 J_C21.2 J_C22.2 J_C23.2 J_C24.2 J_C25.2 J_C26.2 J_C27.2 J_C28.2 J_C29.2 J_C30.2 L1.C MCP1.2 MCP2.9 P1.2 P2.2 P3.16 P4.16 Prog.2 R11.1 S1.2 U1.3 U1.5 U1.21 U2.1 U3.12 U4.12 Y1.2 Y1.4 Y2.2 Y2.4 | length 670.2
  Top Layer w0.381: P2.2 P2.2@6.477,29.972 ; P1.2 10.287,44.704 12.7,44.704 ; J_C24.2 10.033,15.977 5.08,20.93 5.08,25.4 6.096,26.416 6.985,26.416 7.468,26.899 7.468,28.981 P2.2@6.477,29.972 ; J_C1.2 10.16,59.944 Prog.2 11.582,56.286 11.582,45.822 12.7,44.704 ; C17.- P2.2@6.477,29.972 ; U2.1 15.888,40.475 C2.- ; J_C2.2 19.05,64.16 22.744,60.466 C3.2 ; C12.2 19.569,22.465 19.304,22.2 MCP1.2 19.304,19.66 19.522,19.442 R11.1 26.162,19.442 26.935,18.669 MCP2.9 29.359,17.95 30.469,16.84 C13.2 28.956,16.129 27.813,14.986 J_C22.2 27.813,1.981 28.016,1.778 36.322,1.778 36.703,2.159 37.084,1.778 45.593,1.778 J_C20.2 45.593,11.43 47.777,13.614 47.777,23.631 47.448,23.96 ; S1.2 26.416,49.312 27.443,48.285 C4.2 C5.2 C6.2 ; ISCP.6 36.449,46.025 36.068,45.644 5V.C ; 36.703,2.21 J_C21.2 ; L1.C 37.464,41.302 37.413,41.251 5V.C ; C10.2 44.947,20.345 45.047,20.445 45.047,22.047 46.647,23.647 Y2.2 47.448,23.96 ; J_C5.2 45.72,53.986 C8.2 47.269,53.986 47.369,53.886 Y1.4 48.684,56.947 54.61,62.873 ; U1.3 47.236,35.535 46.99,35.535 46.787,35.331 46.787,33.992 46.895,33.884 47.657,33.884 ; U1.5 47.657,33.884 ; Y1.2 52.172,52.286 52.272,52.186 C9.2 54.298,52.186 ; U1.21 53.741,41.346 54.864,42.469 54.864,51.62 54.298,52.186 ; J_C6.2 54.61,62.873 ; U4.12 65.024,21.315 65.024,21.971 66.243,23.19 66.243,40.64 ; U3.12 64.662,42.221 66.243,40.64 ; P3.16 71.501,38.6 71.45,31.877 68.174,31.877 67.183,32.868 67.183,39.7 66.243,40.64 ; J_C16.2 81.153,5.537 79.578,7.112 79.578,11.273 J_C30.2 ; J_C29.2 82.647,21.865 82.88,22.098 82.88,30.476 82.601,30.755 ; J_C28.2 82.601,30.755 ; J_C27.2 82.601,39.645 ; J_C25.2 82.601,57.425 82.906,57.12 82.906,50.161 J_C26.2 82.656,48.535 82.88,48.311 82.88,39.924 82.601,39.645 ; J_C14.2 97.841,22.225 98.425,22.809 98.425,30.531 97.841,31.115 ; J_C13.2 97.841,31.115 ; J_C12.2 97.841,40.005 ; J_C11.2 97.841,48.895 98.425,48.311 98.425,40.589 97.841,40.005 ; 12.7,44.704 C2.- ; C2.- 17.577,44.704 20.995,41.286 26.518,41.286 27.443,42.211 C6.2 ; C6.2 33.807,42.291 34.847,41.251 5V.C ; 47.448,23.96 48.057,23.96 48.503,24.406 C7.2 C11.2 46.747,32.973 47.657,33.884 ; 54.298,52.186 54.421,52.186 54.61,52.375 54.61,62.873 ; 82.601,30.755 82.906,31.06 82.906,39.345 82.605,39.645 82.601,39.645 ; 97.841,31.115 98.425,31.699 98.425,39.421 97.841,40.005
  Bottom Layer w0.381: J_C24.2 10.033,5.283 10.668,5.918 18.39,5.918 18.923,5.385 ; J_C1.2 10.16,67.818 10.363,68.021 18.847,68.021 19.05,67.818 ; J_C23.2 18.923,5.385 ; J_C2.2 19.05,67.818 ; J_C22.2 27.813,10.922 26.848,11.887 19.888,11.887 18.923,10.922 18.923,5.385 ; J_C20.2 45.593,5.232 46.406,6.045 53.67,6.045 54.483,5.232 54.483,5.131 ; J_C5.2 45.72,67.412 45.11,68.021 41.961,68.021 41.427,67.488 41.427,65.38 40.538,64.491 37.313,64.491 36.83,64.973 J_C4.2 36.83,67.818 36.627,68.021 32.69,68.021 31.725,67.056 31.725,65.405 31.064,64.745 28.143,64.745 27.94,64.948 J_C3.2 27.94,67.818 27.737,68.021 19.253,68.021 19.05,67.818 ; J_C19.2 54.483,5.131 ; J_C6.2 54.61,64.973 54.983,64.601 63.127,64.601 ; J_C18.2 63.373,5.08 ; P4.16 75.155,12.975 J_C30.2 82.601,12.975 82.88,13.254 82.88,21.586 82.601,21.865 ; P3.16 76.911,39.997 77.263,39.645 J_C27.2 ; J_C16.2 81.153,2.438 ; J_C29.2 82.601,21.865 ; J_C25.2 79.913,57.425 79.68,57.658 79.68,63.195 81.28,64.795 81.28,64.973 ; J_C15.2 90.043,2.54 89.281,1.778 81.813,1.778 81.153,2.438 ; J_C10.2 90.17,64.973 89.967,64.77 81.483,64.77 81.28,64.973 ; J_C14.2 89.26,22.225 88.9,21.865 82.601,21.865 ; 54.483,5.131 54.762,5.41 63.094,5.41 63.373,5.131 63.373,5.08 ; 63.127,64.601 J_C7.2 63.5,64.973 63.364,64.838 ; 63.127,64.601 63.364,64.838 ; 63.364,64.838 63.906,64.295 71.712,64.295 72.644,64.821 ; 63.373,5.08 63.703,5.41 72.034,5.41 72.263,5.182 J_C17.2 72.263,1.778 80.518,1.778 80.518,1.803 81.153,2.438 ; 72.644,64.821 72.39,65.075 J_C8.2 72.644,64.821 ; 72.644,64.821 76.098,64.821 77.445,66.167 77.445,67.437 78.13,68.123 80.975,68.123 81.28,67.818 J_C9.2 81.28,64.973
INT: MCP2.12 U1.13 | length 32.2
  Top Layer w0.254: MCP2.12 41.199,21.209 42.621,22.631 42.621,36.83 43.637,37.846 46.99,37.846 47.168,37.668 51.797,37.668 U1.13
LED1: R8.2 U1.12 | length 18.5
  Top Layer w0.254: v1(40.894,39.776) 40.894,40.524 R8.2 ; U1.12 54.254,34.08 v1(54.254,33.528)
  Bottom Layer w0.254: v1(40.894,39.776) 40.894,39.345 46.711,33.528 v1(54.254,33.528)
MISO: ISCP.1 MCP2.15 U1.16 | length 72.6
  Top Layer w0.254: ISCP.1 34.671,55.118 35.941,53.848 37.262,53.848 38.238,52.872 38.238,50.662 40.259,48.641 40.259,40.005 38.684,40.005 37.846,39.167 37.846,33.376 40.31,30.912 40.31,25.425 39.903,25.019 MCP2.15 ; U1.16 56.382,36.856 v1(56.382,35.128)
  Bottom Layer w0.254: ISCP.1 35.331,53.696 39.95,53.696 56.382,37.264 v1(56.382,35.128)
MOSI: ISCP.4 MCP2.14 U1.15 | length 84.5
  Top Layer w0.254: ISCP.4 37.821,51.206 37.821,49.4 39.853,47.368 39.853,40.411 38.506,40.411 37.44,39.345 37.44,31.658 39.888,29.21 39.888,28.245 36.678,28.245 36.043,27.61 36.043,24.587 36.881,23.749 MCP2.14 ; v1(54.458,32.868) 55.423,32.868 55.829,33.274 55.829,36.093 55.438,36.093 U1.15
  Bottom Layer w0.254: ISCP.4 40.361,52.578 45.441,47.498 45.441,41.427 44.856,40.843 41.021,40.843 40.335,40.157 40.335,38.075 45.542,32.868 v1(54.458,32.868)
Net5V_A: 5V.A R2.1 | length 2.7
  Top Layer w0.254: R2.1 34.544,38.724 35.017,38.251 5V.A
NetC1_2: C1.2 Prog.5 | length 5.3
  Top Layer w0.254: Prog.5 14.34,51.424 C1.2
NetC17_+: C17.+ D5.C U2.3 | length 12.1
  Top Layer w0.381: D5.C 14.58,35.763 15.316,35.027 U2.3 19.342,35.027 20.688,33.68 C17.+
NetE_C_1: E_C.1 R7.2 | length 12
  Top Layer w0.254: E_C.1 12.7,14.275 13.513,13.462 R7.2
NetL1_A: L1.A R8.1 | length 2.5
  Top Layer w0.254: L1.A 39.776,38.302 40.199,38.724 R8.1
NetMCP1_1: MCP1.1 MCP2.1 | length 16.5
  Top Layer w0.254: MCP1.1 20.574,22.098 25.4,26.924 30.582,26.924 30.81,27.153 30.81,28.6 30.582,28.829 MCP2.1
NetMCP1_4: MCP1.4 MCP2.2 | length 20.1
  Top Layer w0.254: MCP1.4 16.764,19.761 16.967,19.558 18.39,19.558 18.669,19.837 18.669,24.816 21.412,27.559 MCP2.2
NetMCP1_8: MCP1.8 R11.2 | length 4.5
  Top Layer w0.254: MCP1.8 20.574,17.424 20.792,17.642 R11.2
NetMCP2_17: MCP2.17 R10.1 | length 18.9
  Top Layer w0.254: R10.1 36.079,21.982 37.211,23.114 39.497,23.114 39.903,23.52 39.903,24.13 39.624,24.409 37.313,24.409 36.454,25.268 36.454,27.178 36.835,27.559 MCP2.17
RESET: C1.1 C3.1 ISCP.5 R1.1 R4.2 S1.1 U1.29 | length 56.2
  Top Layer w0.254: C1.1 R4.2 20.944,54.864 R1.1 C3.1 22.112,58.268 23.876,58.268 ; S1.1 S1.1@26.416,58.42 ; ISCP.5 33.909,50.825 33.823,50.912 31.755,50.912 30.216,52.451 24.409,52.451 22.022,54.839 22.022,56.413 23.876,58.268 ; v1(44.882,41.906) 46.11,41.906 47.483,40.533 U1.29 ; 23.876,58.268 24.028,58.42 S1.1@26.416,58.42 ; 23.876,58.268 26.416,58.268 S1.1@26.416,58.42
  Bottom Layer w0.254: ISCP.5 34.747,50.038 34.747,49.124 35.268,48.603 39.244,48.603 43.459,44.388 43.459,43.329 v1(44.882,41.906)
RXP: Prog.4 U1.31 | length 70.8
  Top Layer w0.254: Prog.4 12.7,53.162 14.376,54.839 14.376,67.005 15.342,67.97 35.052,67.97 35.484,67.539 35.484,63.053 39.05,59.487 39.05,52.056 42.393,48.714 42.393,43.337 42.735,43.337 43.803,42.269 43.803,40.991 43.951,40.843 45.228,40.843 U1.31
S1: U1.32 U3.10 U4.10 | length 49.5
  Top Layer w0.254: U1.32 46.104,38.456 46.13,38.43 47.854,38.43 v1(49.987,40.564) ; U4.10 63.362,24.13 65.151,25.919 65.151,38.176 v1(63.362,39.878) U3.10
  Bottom Layer w0.254: v1(49.987,40.564) 55.982,34.569 58.053,34.569 v1(63.362,39.878)
S2: U1.1 U3.11 U4.11 | length 67
  Top Layer w0.254: v1(42.875,21.869) 43.282,22.276 43.282,33.833 46.104,36.655 U1.1 ; U4.11 64.012,23.121 65.634,24.742 ; U3.11 64.012,41.068 65.634,39.446 65.634,24.742 ; v1(65.634,23.8) 65.634,24.742
  Bottom Layer w0.254: v1(42.875,21.869) 42.875,21.793 57.785,21.793 59.792,23.8 v1(65.634,23.8)
S3: U1.2 U3.14 U4.14 | length 72.2
  Top Layer w0.254: v1(45.771,26.238) 45.771,35.391 U1.2 ; U4.14 64.012,34.489 v1(63.424,35.077) 58.975,39.526 58.699,39.526 58.699,40.843 56.388,43.155 56.388,48.87 58.064,50.546 63.656,50.546 64.012,50.902 U3.14
  Bottom Layer w0.254: v1(45.771,26.238) 48.793,23.216 55.98,23.216 56.54,23.776 56.54,28.981 56.925,29.366 56.925,30.068 61.934,35.077 v1(63.424,35.077)
S4: U1.9 U3.13 U4.13 | length 49.9
  Top Layer w0.254: U1.9 52.044,31.192 v1(57.048,31.115) ; U4.13 64.662,35.116 v1(63.71,36.068) 59.106,40.672 59.106,41.478 56.794,43.79 56.794,48.514 57.379,49.098 62.89,49.098 64.662,50.87 U3.13
  Bottom Layer w0.254: v1(57.048,31.115) 62.001,36.068 v1(63.71,36.068)
Salida_Mux_1: U1.24 U3.1 | length 12.1
  Top Layer w0.254: U1.24 v1(52.044,47.523) ; v1(57.328,47.93) 57.531,47.727 57.531,46.099 U3.1
  Bottom Layer w0.254: v1(52.044,47.523) 56.921,47.523 v1(57.328,47.93)
Salida_Mux_2: U1.25 U4.1 | length 25.4
  Top Layer w0.254: U1.25 50.521,42.339 v1(50.521,38.278) ; v1(55.601,23.749) 57.512,21.838 U4.1
  Bottom Layer w0.254: v1(50.521,38.278) 51.537,38.278 55.88,33.934 55.88,30.354 55.601,30.075 v1(55.601,23.749)
SCK: ISCP.3 MCP2.13 U1.17 | length 87
  Top Layer w0.254: ISCP.3 32.842,52.578 31.394,54.026 31.394,55.601 32.969,57.175 36.271,57.175 38.644,54.803 38.644,51.308 40.665,49.287 40.665,44.252 42.189,42.728 42.189,24.358 40.31,22.479 MCP2.13 ; U1.17 56.434,38.836 56.765,39.167 v1(56.765,40.259)
  Bottom Layer w0.254: ISCP.3 32.461,54.026 32.461,55.626 33.299,56.464 40.56,56.464 v1(56.765,40.259)
SCL: P1.3 P2.3 R5.1 U1.28 | length 92.9
  Top Layer w0.254: P2.3 4.851,28.6 4.851,45.06 P1.3 ; R5.1 43.053,52.694 43.053,46.413 ; v1(42.926,43.84) 43.053,43.967 43.053,46.413 ; U1.28 43.053,46.413
  Bottom Layer w0.254: P2.3 2.743,26.492 2.743,21.768 3.759,20.752 6.807,20.752 8.331,22.276 21.361,22.276 v1(42.926,43.84)
SDA: P1.4 P2.4 R6.1 U1.27 | length 81.2
  Top Layer w0.254: P2.4 5.309,28.6 5.309,45.06 P1.4 ; v1(40.589,51.537) 39.929,52.197 R6.1 40.727,53.467 43.586,53.467 44.526,52.527 44.526,46.071 U1.27
  Bottom Layer w0.254: P1.4 11.582,51.333 11.582,55.22 12.268,55.905 27.838,55.905 32.233,51.511 40.564,51.511 v1(40.589,51.537)
SOS: P1.8 P2.8 U1.23 | length 94.4
  Top Layer w0.254: U1.23 52.61,42.418 53.137,42.748 v1(53.137,49.682)
  Bottom Layer w0.254: P2.8 5.309,23.52 5.309,39.98 P1.8 5.283,42.088 5.283,53.391 8.23,56.337 24.994,56.337 25.781,57.125 49.022,57.125 53.137,53.01 v1(53.137,49.682)
TXP: Prog.3 U1.30 | length 42.4
  Top Layer w0.254: v1(44.323,43.536) 44.323,41.533 44.581,41.275 45.795,41.275 47.102,39.967 U1.30
  Bottom Layer w0.254: Prog.3 19.533,54.864 23.292,51.105 37.566,51.105 44.323,44.347 v1(44.323,43.536)
Vin: D5.A P1.1 P2.1 | length 34.1
  Top Layer w0.381: P2.1 2.692,31.217 2.692,47.523 P1.1 4.953,47.498 6.629,47.498 13.208,40.919 D5.A
XTAL1: C8.1 U1.7 Y1.1 | length 22.9
  Top Layer w0.254: C8.1 47.269,52.186 47.369,52.286 Y1.1 48.684,44.061 v1(48.666,44.044) ; U1.7 50.495,34.459 v1(50.495,36.398)
  Bottom Layer w0.254: v1(48.666,44.044) 48.87,44.044 49.073,43.84 49.073,37.821 v1(50.495,36.398)
XTAL2: C9.1 U1.8 Y1.3 | length 29.6
  Top Layer w0.254: v1(48.336,43.078) 48.768,43.078 49.886,44.196 49.886,53.683 50.089,53.886 Y1.3 52.272,53.986 C9.1 ; U1.8 52.172,35.004 v1(52.172,35.687)
  Bottom Layer w0.254: v1(48.336,43.078) 48.336,36.627 49.276,35.687 v1(52.172,35.687)
pads on no net: MCP1.5 MCP2.3 MCP2.4 MCP2.5 MCP2.6 MCP2.10 MCP2.11 P1.7 P2.7 Prog.6 U1.11 U1.19 U1.22 U1.26 U4.16 U4.17

## Polygon pours and split planes (outlines as drawn)
GND on Bottom Layer "GND BOTTOM PLANE" (solid, pour order 0): -4.953,77.089 111.633,77.089 116.459,72.263 112.903,68.707 112.903,-9.525 -7.112,-9.525 -10.668,-13.081
GND on Top Layer "GND TOP PLANE" (solid, pour order 2): -4.699,77.47 -2.921,75.692 105.283,75.692 108.966,72.009 108.966,-6.35 -7.747,-6.35 -10.922,-9.525

## Silkscreen, mask and mechanical layers (free items; w line width, h text height)
Top Overlay:
  lines w0.254: 46.482,9.652 46.609,9.525 53.975,9.525 53.975,13.462 46.482,13.462 46.482,9.652 ; 46.482,57.277 46.482,61.214 53.848,61.214 53.975,61.087 53.975,57.277 46.482,57.277 ; 85.979,31.115 89.789,31.115 89.916,31.242 89.916,38.608 85.979,38.608 85.979,31.115
  text "S" at 47.244,60.452 h1 r270
  text "GND" at 49.657,60.452 h1 r270
  text "5V" at 52.197,60.452 h1 r270
  text "S" at 89.154,37.846 h1 r180
  text "GND" at 89.154,35.433 h1 r180
  text "5V" at 89.154,32.893 h1 r180
  text "5V" at 48.26,10.287 h1 r90
  text "GND" at 50.8,10.287 h1 r90
  text "S" at 53.213,10.287 h1 r90
Mechanical 2: